# Altium PCB PCB_3U_BNC.PCBDOC
Units mil, origin at the board's own origin, x right, y up, seen from the top; angles counter-clockwise.
Board outline 2496.06 x 3937 mil, 4 copper layers (TopLayer, MidLayer1, Internal Plane 1, BottomLayer), stack 40.617 mil thick; 81 components, 65 nets, 423 pads, 254 vias.
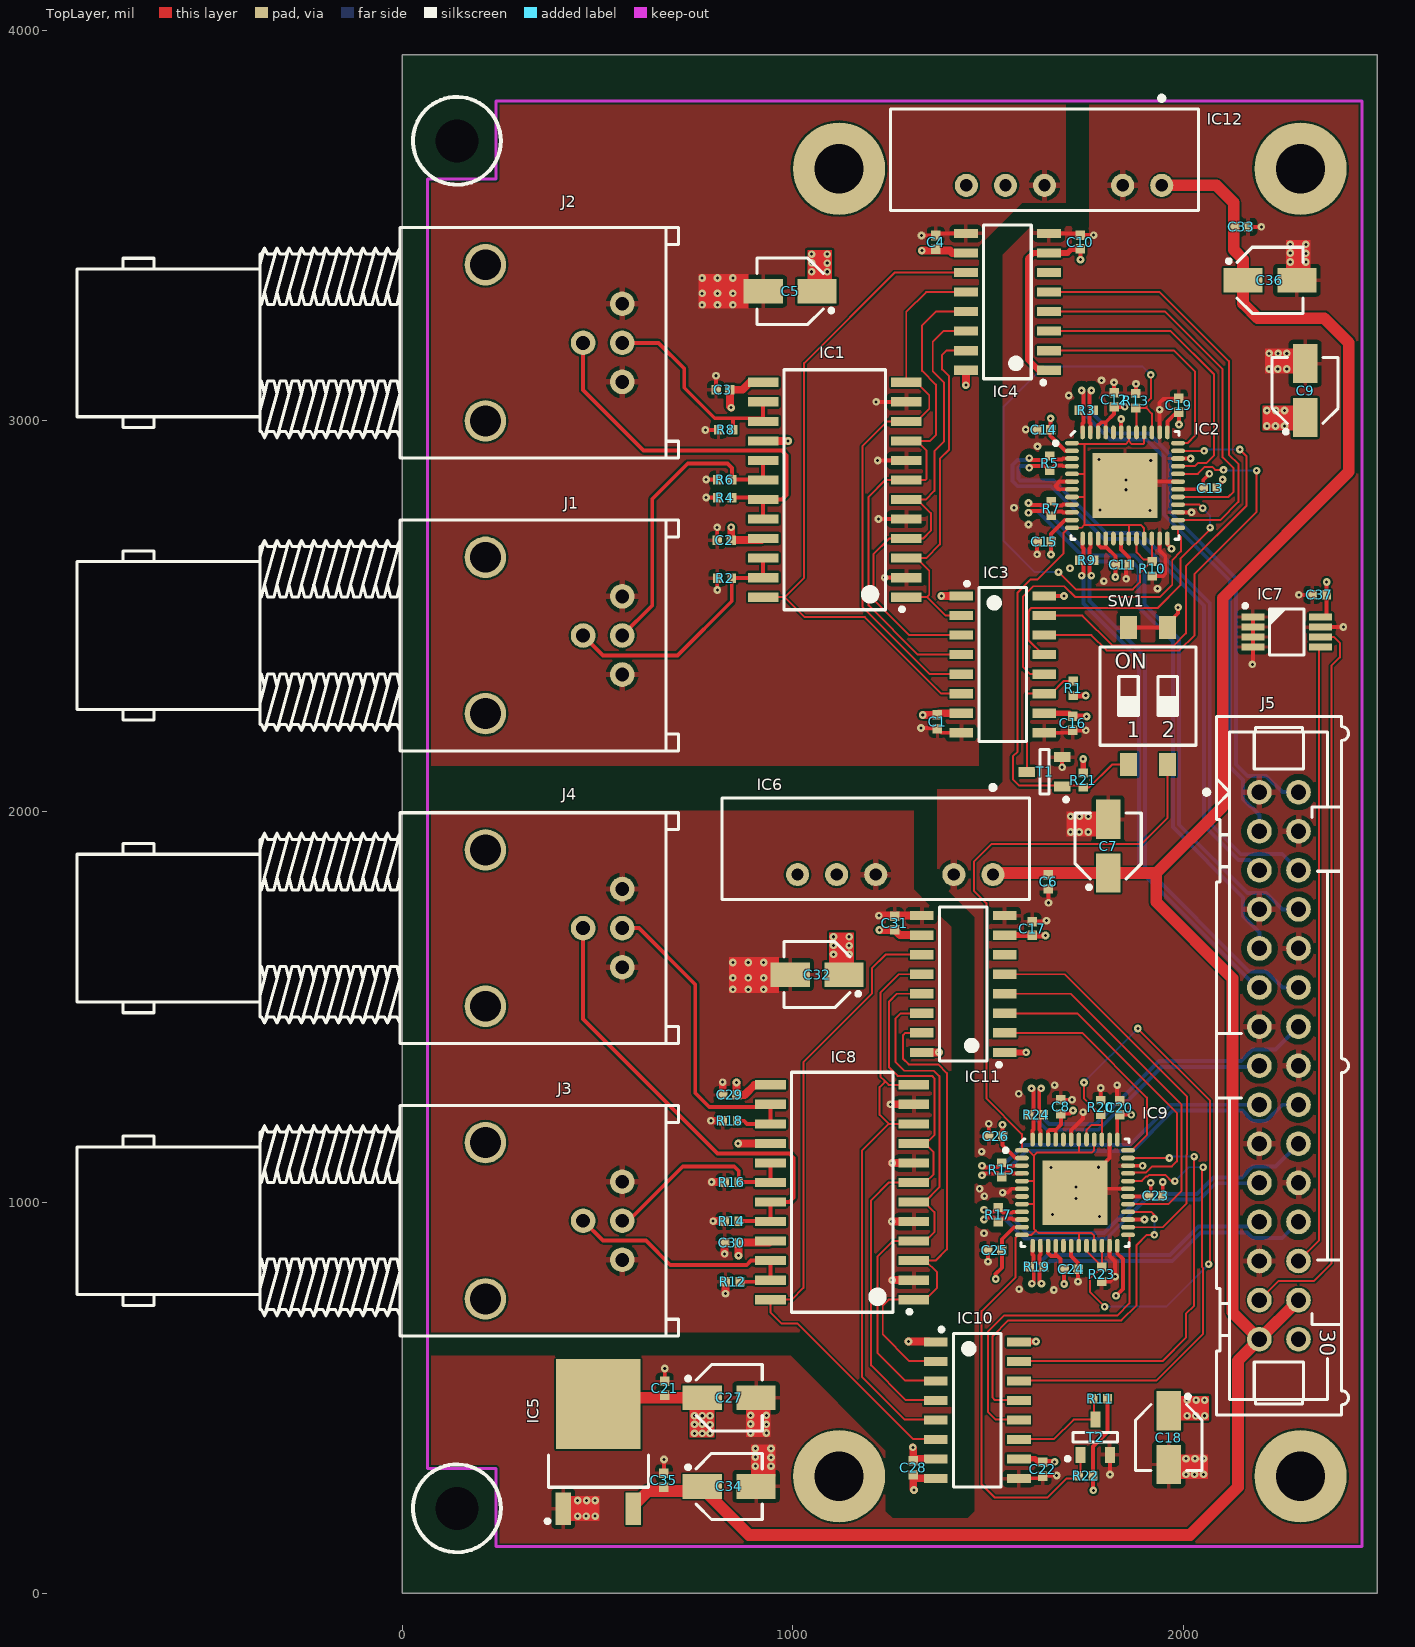
[diagram p0: TopLayer view]
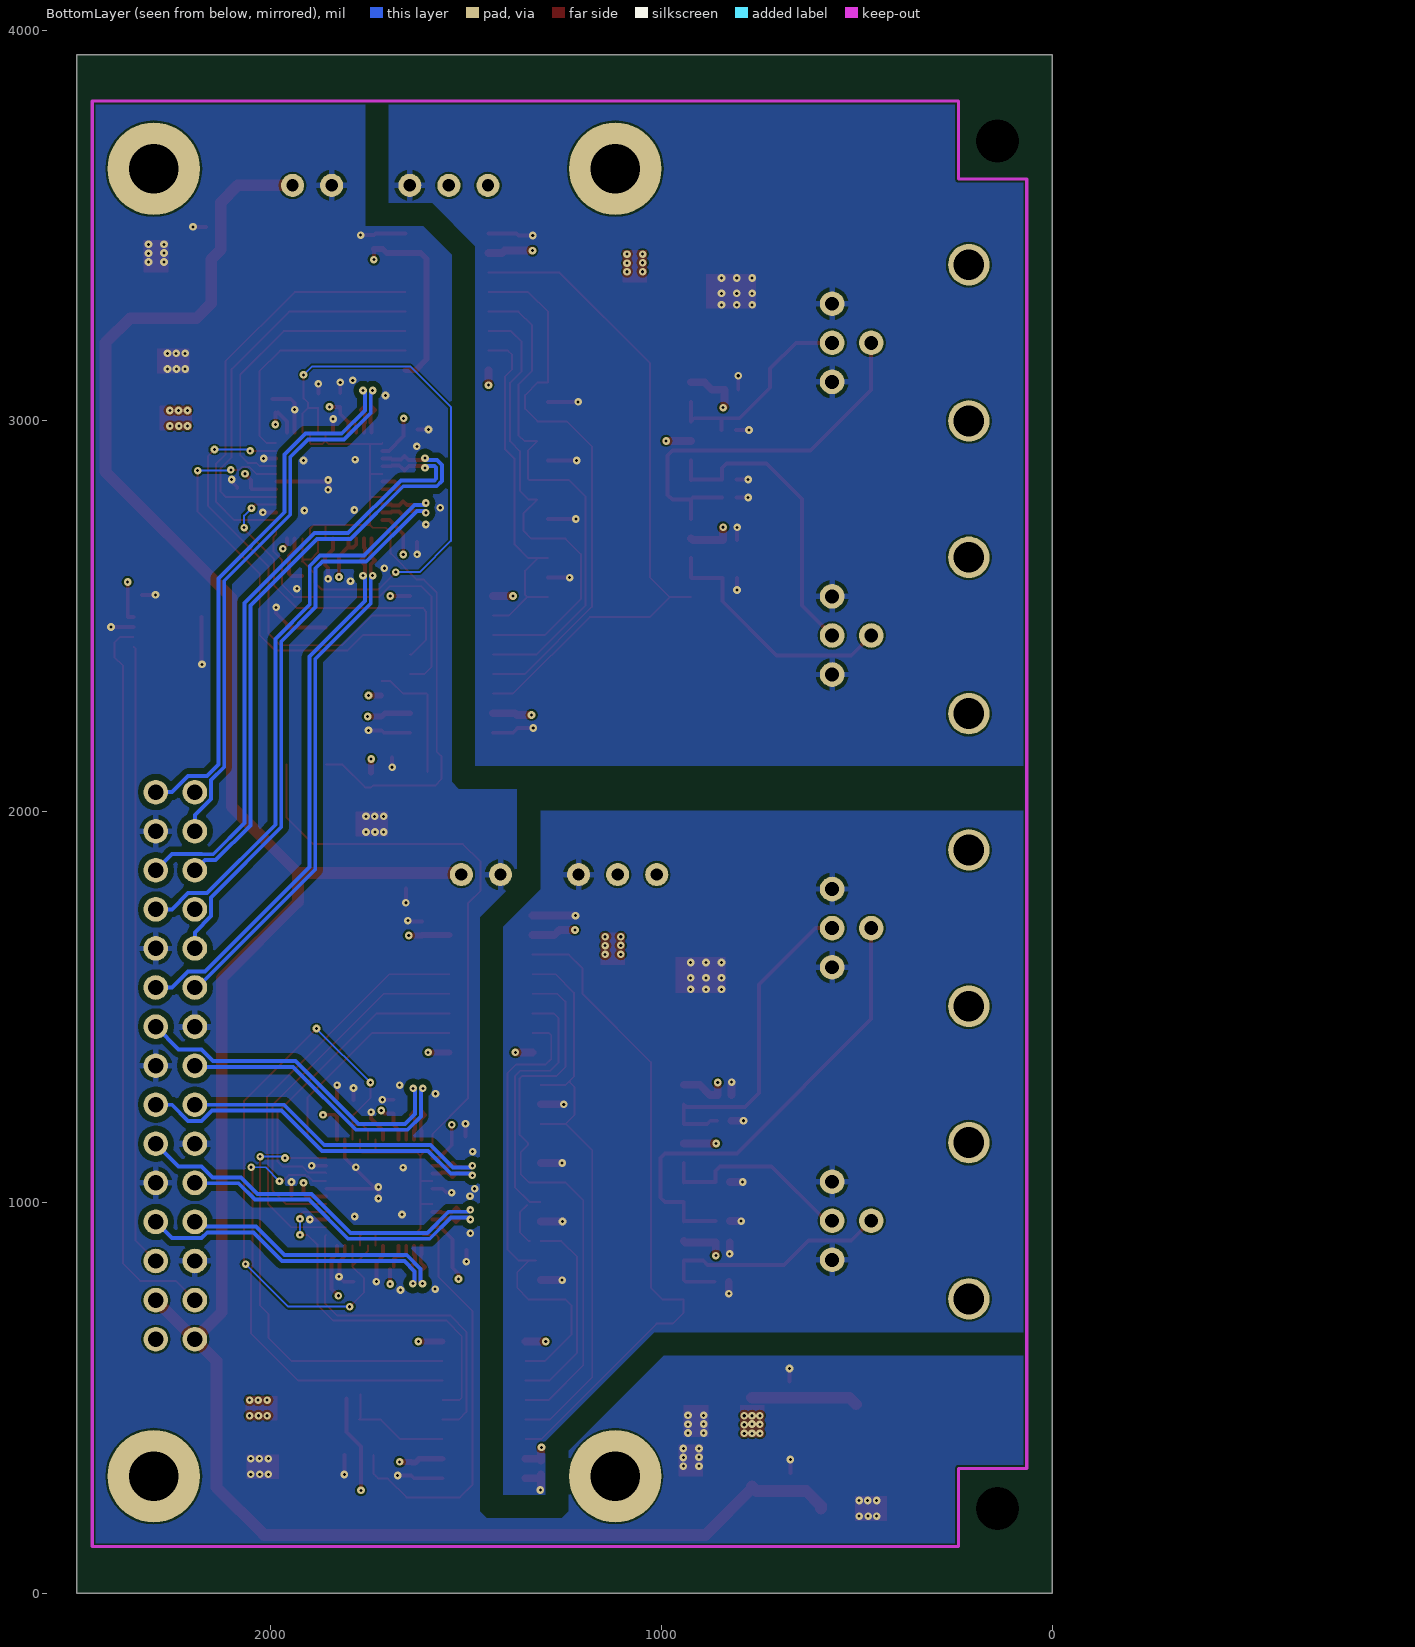
[diagram p1: BottomLayer view, seen from below]
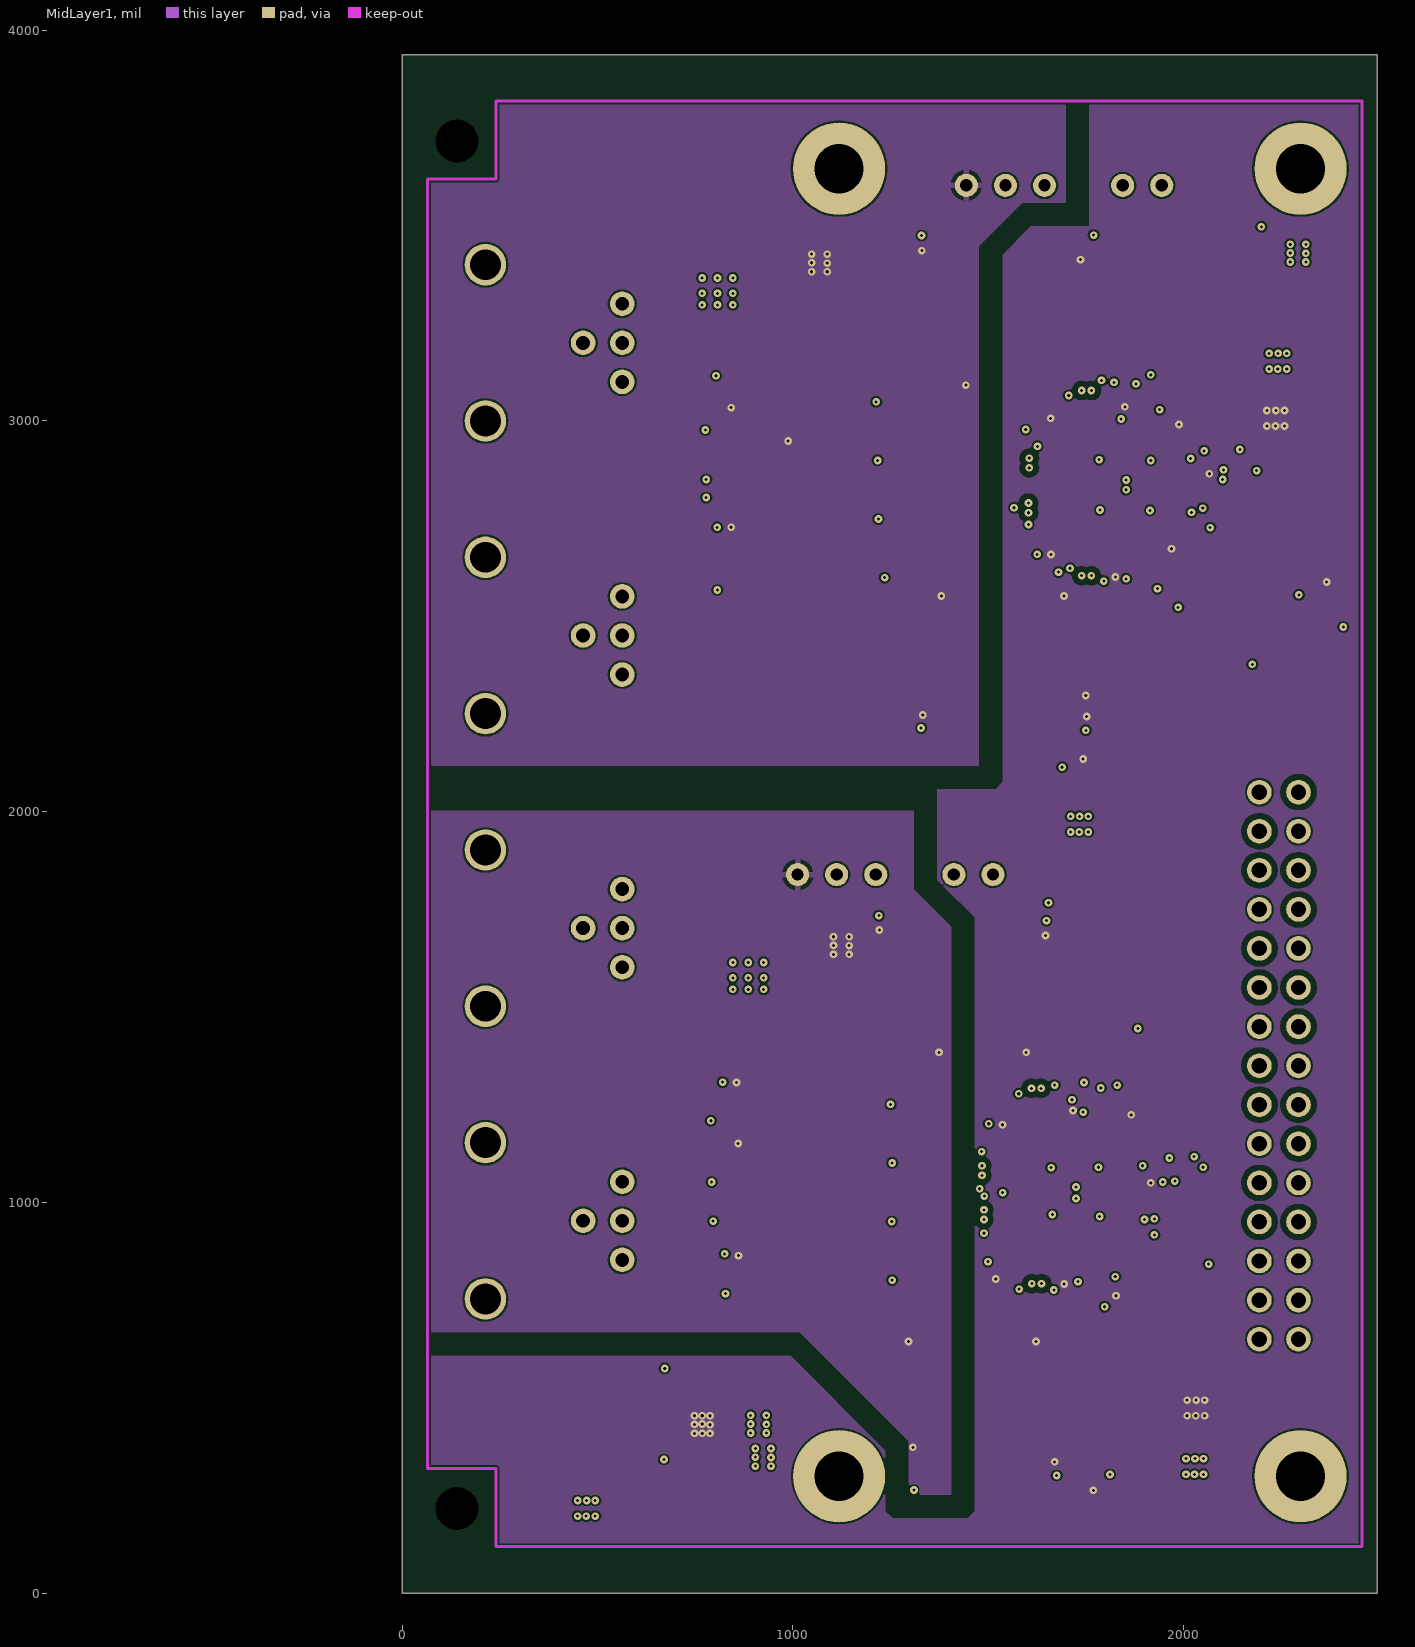
[diagram p2: MidLayer1]
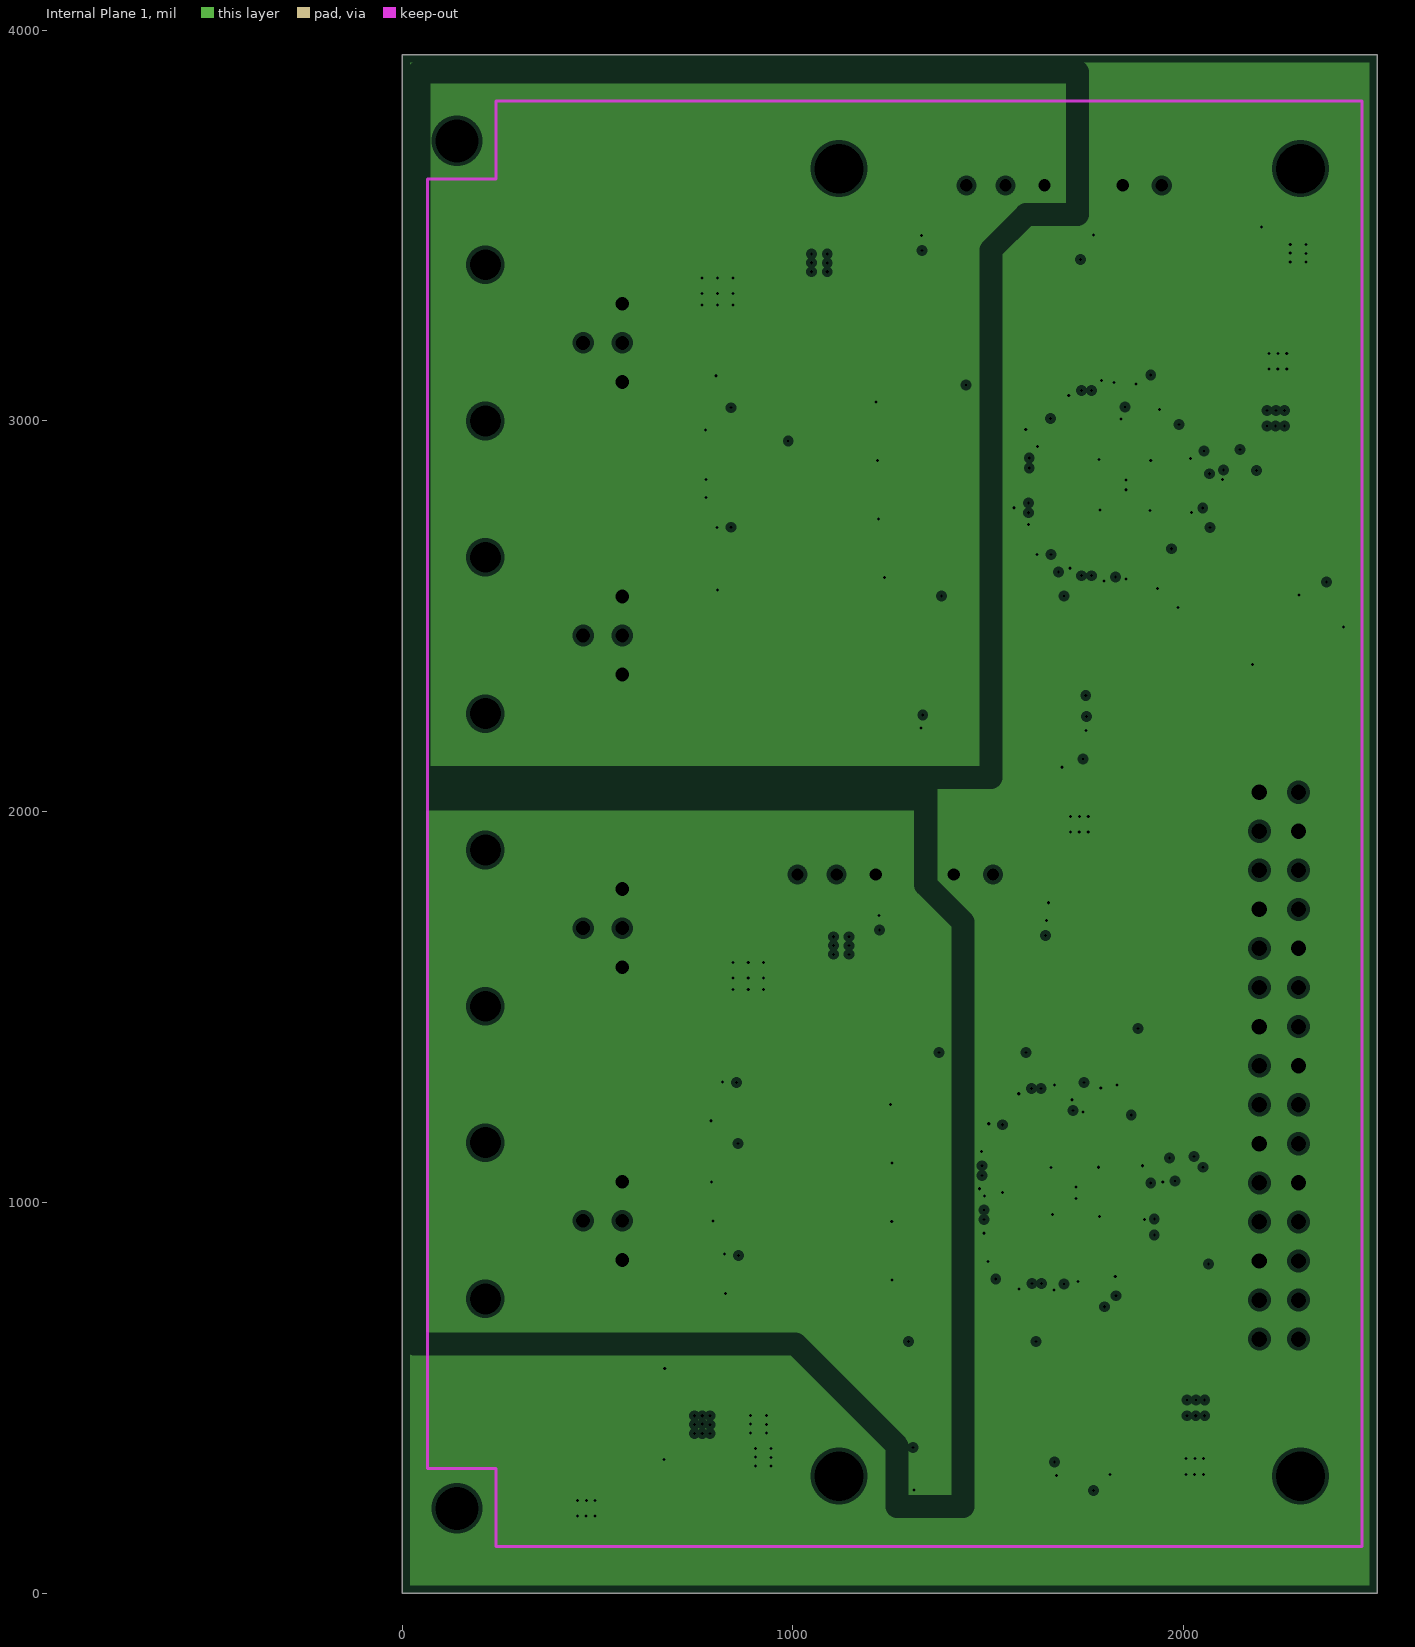
[diagram p3: Internal Plane 1, clearances drawn from the general rule]
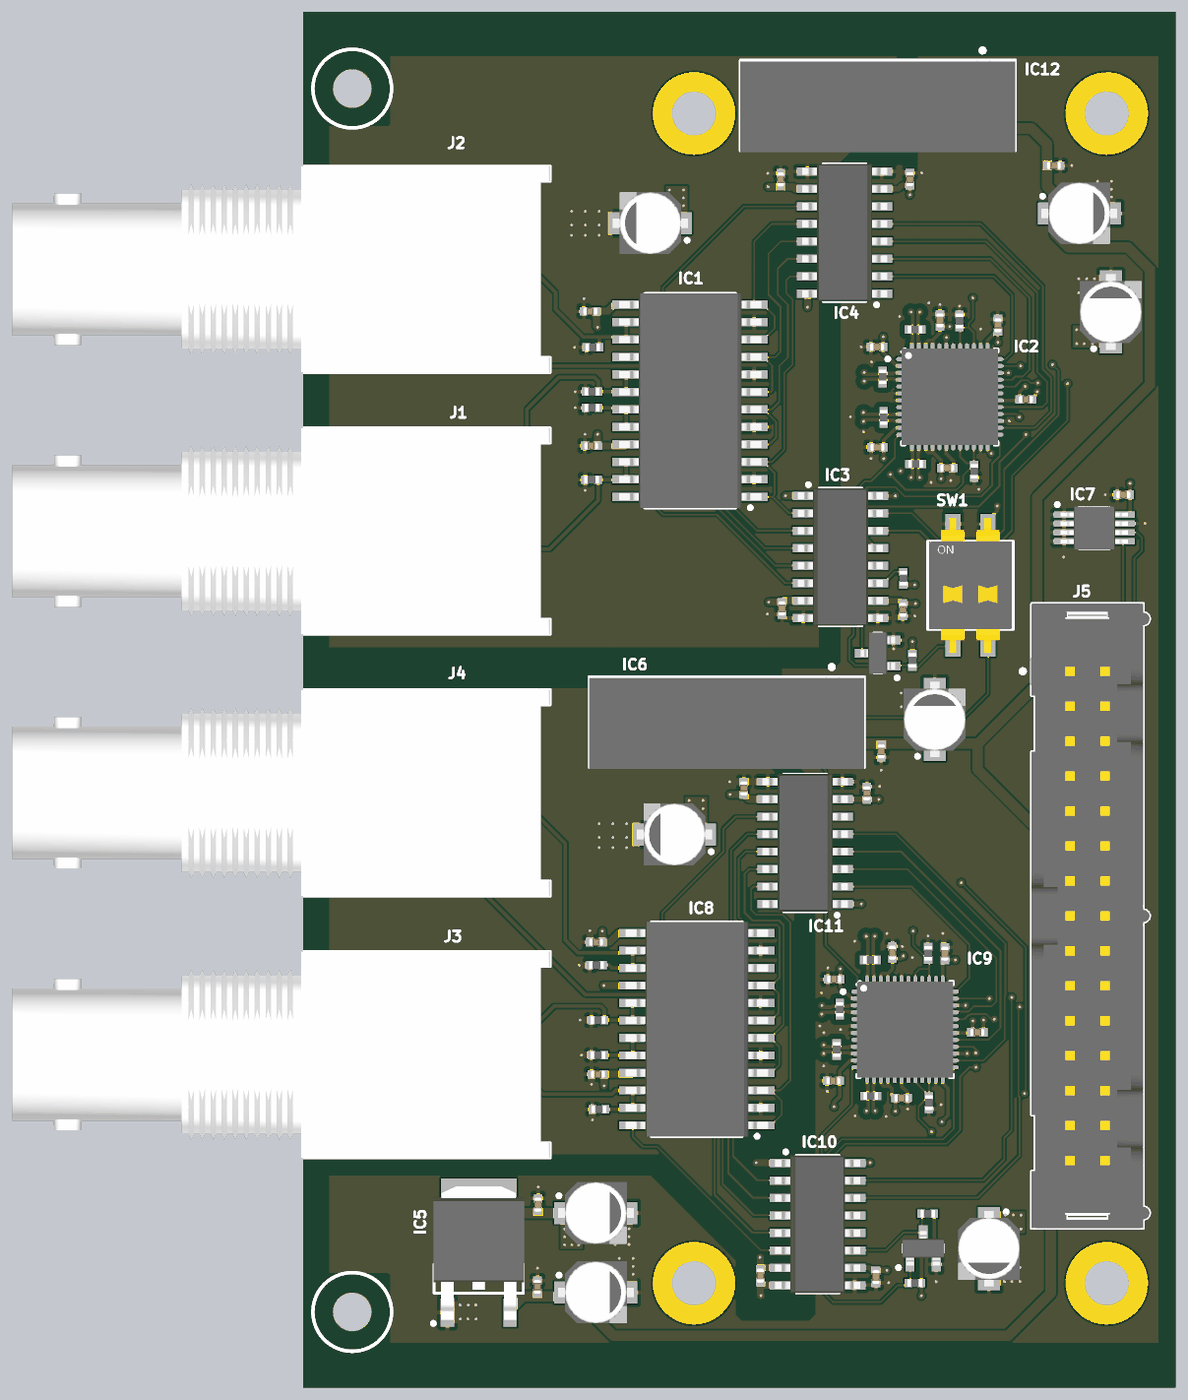
[diagram p4: 3D render of the assembled board from above, using the file's embedded part models]

## Layer stack, top to bottom
TopSolder: solder mask 0.4, Solder Resist, Dk 3.5
TopLayer: signal copper 1.4
Dielectric1: core 15, FR-4, Dk 4.8
MidLayer1: signal copper 1.4
Dielectric 3: prepreg 5, Dk 4.2
Internal Plane 1: plane copper 1.417, net (Multiple Nets)
Dielectric2: core 15, FR-4, Dk 4.2
BottomLayer: signal copper 1.4
BottomSolder: solder mask 0.4, Solder Resist, Dk 3.5

## Board outline
0,0 2496.06,0 2496.06,3937 0,3937

## Design rules (kind name [scope] priority, off if disabled: settings)
Clearance Clearance_1 [(InDifferentialPairClass('All Differential Pairs')) vs InPolygon] p1: gap=10 except(15: Arc-Poly Track-Poly SMDPad-Poly THPad-Poly Via-Poly Fill-Poly Poly-Poly)
Clearance [All] p2: gap=5
DiffPairsRouting [All] p1: maxlimit=10 minlimit=5 mostfreqgap=5 toplayer_minwidth=5 toplayer_maxwidth=15 toplayer_prefwidth=10 midlayer1_minwidth=5 midlayer1_maxwidth=15 midlayer1_prefwidth=10 bottomlayer_minwidth=5 bottomlayer_maxwidth=15 bottomlayer_prefwidth=10 maxuncoupledlength=500
FabricationTestPointUsage TestPointUsage [All] p1: valid=0 allowmultiple=FALSE
FabricationTestpoint Testpoint [All] p1: side=3 testpointundercomponent=TRUE minsize=40 maxsize=100 preferedsize=60 minholesize=20 maxholesize=40 preferedholesize=32 testpointgrid=1 allowsidetop=TRUE allowsidebottom=TRUE usegrid=TRUE gridtolerance=0.01
HoleSize [All] p1: absolutevalues=TRUE maxlimit=150 minlimit=1 maxpercent=80.000 minpercent=20.000
PlaneClearance [All] p1: clearance=10
PlaneConnect [All] p1: planeconnectstyle=Direct reliefexpansion=20 reliefentries=4 reliefconductorwidth=10 reliefairgap=10
PolygonConnect [All] p1: connectstyle=Relief reliefconductorwidth=10 reliefentries=4 polygonreliefangle="45 Angle" airgapwidth=10
RoutingVias [All] p1: holewidth=7.87 width=19.68 viastyle="Through Hole" minholewidth=7.87 minwidth=19.68 maxholewidth=28 maxwidth=50
SilkToSolderMaskClearance SilkscreenOverComponentPads [IsPad] p1: minsilkscreentomaskgap=10 clearancetoexposedcopper=TRUE
SolderMaskExpansion [All] p1: expansion=2
Width [All] p1: maxlimit=50 minlimit=5 preferedwidth=5
23 further rules are at their usual default settings.

## Classes and differential pairs
differential pair LVDS1: +LVDS1_P -LVDS1_N
differential pair LVDS2: +LVDS2_P -LVDS2_N
differential pair LVDS3: +LVDS3_P -LVDS3_N
differential pair LVDS4: +LVDS4_P -LVDS4_N
differential pair LVDS5: +LVDS5_P -LVDS5_N
differential pair LVDS6: +LVDS6_P -LVDS6_N
differential pair LVDS7: +LVDS7_P -LVDS7_N
differential pair LVDS8: +LVDS8_P -LVDS8_N

## Components (designator, comment, footprint, x,y, rotation, side; value= is the part's Value field where it differs from the comment)
C1 "100nF" CAPC1005X55N 1370,2230 r90 top
C2 "100nF" CAPC1005X55N 824,2695 r0 top
C3 "100nF" CAPC1005X55N 821,3080 r0 top
C4 "100nF" CAPC1005X55N 1366,3457 r270 top
C5 "10uF" CAPAE430X540N 993,3332 r180 top
C6 "100nF" CAPC1005X55N 1654,1821 r90 top
C7 "10uF" CAPAE430X540N 1807,1912 r90 top
C8 "100nF" CAPC1005X55N 1686,1245 r270 top
C9 "10uF" CAPAE430X540N 2311,3078 r90 top
C10 "100nF" CAPC1005X55N 1736,3458 r270 top
C11 "100nF" CAPC1005X55N 1843,2632 r180 top
C12 "100nF" CAPC1005X55N 1822,3054 r270 top
C13 "100nF" CAPC1005X55N 2068,2828 r180 top
C14 "100nF" CAPC1005X55N 1642,2978 r0 top
C15 "100nF" CAPC1005X55N 1643,2691 r0 top
C16 "100nF" CAPC1005X55N 1716,2226 r90 top
C17 "100nF" CAPC1005X55N 1613,1701 r270 top
C18 "10uF" CAPAE430X540N 1962,398 r270 top
C19 "100nF" CAPC1005X55N 1988,3040 r270 top
C20 "100nF" CAPC1005X55N 1836,1242 r270 top
C21 "100nF" CAPC1005X55N 672,524 r270 top
C22 "100nF" CAPC1005X55N 1639,317 r90 top
C23 "100nF" CAPC1005X55N 1929,1017 r180 top
C24 "100nF" CAPC1005X55N 1712,829 r180 top
C25 "100nF" CAPC1005X55N 1517,878 r0 top
C26 "100nF" CAPC1005X55N 1519,1169 r0 top
C27 "10uF" CAPAE430X540N 837,500 r0 top
C28 "100nF" CAPC1005X55N 1308,321 r90 top
C29 "100nF" CAPC1005X55N 838,1275 r0 top
C30 "100nF" CAPC1005X55N 843,897 r0 top
C31 "100nF" CAPC1005X55N 1261,1715 r270 top
C32 "10uF" CAPAE430X540N 1062,1583 r180 top
C33 "100nF" CAPC1005X55N 2148,3497 r180 top
C34 "10uF" CAPAE430X540N 837,273 r0 top
C35 "100nF" CAPC1005X55N 670,289 r270 top
C36 "10uF" CAPAE430X540N 2221,3360 r0 top
C37 "100nF" CAPC1005X55N 2347,2555 r0 top
IC1 "SN74BCT25245DW" SOIC127P1030X265-24N 1107,2824 r180 top
IC2 "SN65MLVD040RGZT" QFN50P700X700X100-49N-S420 1850,2835 r0 top
IC3 "SI8651BB-B-IS1" SOIC127P600X175-16N 1537,2377 r0 top
IC4 "SI8651BB-B-IS1" SOIC127P600X175-16N 1549,3305 r180 top
IC5 "LD1117DT33TR" TO228P972X240-3N-R540X510 502,387 r90 top
IC6 "TMA 0505S" DCDC_TRACO_TMA 1212,1839 r180 top
IC7 "24LC64-I/MS" SOP65P490X110-8N 2264,2460 r0 top
IC8 "SN74BCT25245DW" SOIC127P1030X265-24N 1126,1026 r180 top
IC9 "SN65MLVD040RGZT" QFN50P700X700X100-49N-S420 1722,1025 r0 top
IC10 "SI8651BB-B-IS1" SOIC127P600X175-16N 1472,468 r0 top
IC11 "SI8651BB-B-IS1" SOIC127P600X175-16N 1436,1559 r180 top
IC12 "TMA 0505S" DCDC_TRACO_TMA 1644,3603 r180 top
J1 "BNC" BOMAR_364A2595 319,2451 r180 top
J2 "BNC" BOMAR_364A2595 319,3200 r180 top
J3 "BNC" BOMAR_364A2595 319,953 r180 top
J4 "BNC" BOMAR_364A2595 319,1702 r180 top
J5 "Familly" 3M_N2530-6002RB 2244,1350 r270 top
R1 "10k" RESC1005X40N 1717,2316 r270 top
R2 "10k" RESC1005X40N 825,2598 r0 top
R3 "100" RESC1005X40N 1751,3028 r180 top
R4 "10k" RESC1005X40N 826,2804 r0 top
R5 "100" RESC1005X40N 1658,2892 r270 top
R6 "10k" RESC1005X40N 826,2850 r0 top
R7 "100" RESC1005X40N 1661,2776 r270 top
R8 "10k" RESC1005X40N 828,2977 r0 top
R9 "100" RESC1005X40N 1752,2643 r0 top
R10 "10k" RESC1005X40N 1920,2622 r270 top
R11 "10k" RESC1005X40N 1787,498 r0 top
R12 "10k" RESC1005X40N 846,797 r0 top
R13 "100" RESC1005X40N 1878,3052 r90 top
R14 "10k" RESC1005X40N 843,952 r0 top
R15 "100" RESC1005X40N 1535,1083 r270 top
R16 "10k" RESC1005X40N 843,1052 r0 top
R17 "100" RESC1005X40N 1526,968 r270 top
R18 "10k" RESC1005X40N 839,1209 r0 top
R19 "100" RESC1005X40N 1624,835 r0 top
R20 "10k" RESC1005X40N 1788,1243 r90 top
R21 "10k" RESC1005X40N 1743,2081 r90 top
R22 "10k" RESC1005X40N 1750,300 r0 top
R23 "100" RESC1005X40N 1790,816 r270 top
R24 "100" RESC1005X40N 1623,1224 r180 top
SW1 "Switch" SW_OMRON_A6S-2102-H 1909,2296 r90 top
T1 "BSS138LT1G" SOT95P240X110-3N 1644,2102 r180 top
T2 "BSS138LT1G" SOT95P240X110-3N 1774,399 r90 top

## Footprints (in the part's own frame and the unit in brackets; to place one, negate y for a bottom-side part, rotate by r counter-clockwise, add the part's x,y. Pads: shape width x height; smd on the part's side, far side on the other; paste and mask are expansions set on the pad)
3M_N2530-6002RB [mm] "30 Contacts - Straight .100\" x .100\" Low Profile Four-Wall Header"
  round 1.6 hole 1: 1(-17.78,-1.27) 2(-17.78,1.27) 3(-15.24,-1.27) 4(-15.24,1.27) 5(-12.7,-1.27) 6(-12.7,1.27) 7(-10.16,-1.27) 8(-10.16,1.27) 9(-7.62,-1.27) 10(-7.62,1.27) 11(-5.08,-1.27) 12(-5.08,1.27) 13(-2.54,-1.27) 14(-2.54,1.27) 15(0,-1.27) 16(0,1.27) 17(2.54,-1.27) 18(2.54,1.27) 19(5.08,-1.27) 20(5.08,1.27) 21(7.62,-1.27) 22(7.62,1.27) 23(10.16,-1.27) 24(10.16,1.27) 25(12.7,-1.27) 26(12.7,1.27) 27(15.24,-1.27) 28(15.24,1.27) 29(17.78,-1.27) 30(17.78,1.27)
  silkscreen extent -22.71,-4.85 22.71,4.52, body extent -22.71,-4.11 22.71,4.52, height 9.91
BOMAR_364A2595 [mm] "Dual Right Angle 50 Ohm BNC Jack, White Valox Case"
  round 1.6 hole 0.9: 1(-6.2,2.54) 2(-6.2,0) 3(-6.2,-2.54) 4(-3.66,0)
  round 2.7 hole 2: 6(2.69,-5.08) 7(2.69,5.08)
  silkscreen extent -9.85,-7.5 29.25,7.5, body extent -9.85,-7.5 29.25,7.5, height 29.3
CAPAE430X540N [mm] "Capacitor, Aluminium Electrolytric, 4.3mm L X 4.3mm W X 5.4mm H, IPC Medium Density"
  rect 2.55x1.6 smd: 1(-1.75,0) 2(1.75,0)
  silkscreen extent -2.8,-2.15 2.15,2.15, body extent -2.75,-2.25 2.75,2.25, height 5.7
CAPC1005X55N [mm] "Chip Capacitor, Body 1.0x0.55mm, IPC Medium Density"
  rect 0.62x0.62 smd: 1(-0.45,0) 2(0.45,0)
  body extent -0.52,-0.27 0.53,0.28, height 0.55
DCDC_TRACO_TMA [mm] "TMA Series , Body 19.5x6.1mm, SIP-6, Unregulated"
  round 1.5 hole 0.8: 1(-7.62,0) 2(-5.08,0) 4(0,0) 5(2.54,0) 6(5.08,0)
  silkscreen extent -10,-5.82 10,1.63, body extent -10,-4.97 10,1.73, height 10.45
QFN50P700X700X100-49N-S420 [mm] "QFN, 0.50mm Pitch, Square; 48 Pin, 7.00mm L X 7.00mm W X 1mm H body (W/Thermal Tab 4.2mm X 4.2mm), IPC Medium Density"
  oval 0.9x0.3 smd: 1(-3.45,2.75) 2(-3.45,2.25) 3(-3.45,1.75) 4(-3.45,1.25) 5(-3.45,0.75) 6(-3.45,0.25) 7(-3.45,-0.25) 8(-3.45,-0.75) 9(-3.45,-1.25) 10(-3.45,-1.75) 11(-3.45,-2.25) 12(-3.45,-2.75) 25(3.45,-2.75) 26(3.45,-2.25) 27(3.45,-1.75) 28(3.45,-1.25) 29(3.45,-0.75) 30(3.45,-0.25) 31(3.45,0.25) 32(3.45,0.75) 33(3.45,1.25) 34(3.45,1.75) 35(3.45,2.25) 36(3.45,2.75)
  oval 0.3x0.9 smd: 13(-2.75,-3.45) 14(-2.25,-3.45) 15(-1.75,-3.45) 16(-1.25,-3.45) 17(-0.75,-3.45) 18(-0.25,-3.45) 19(0.25,-3.45) 20(0.75,-3.45) 21(1.25,-3.45) 22(1.75,-3.45) 23(2.25,-3.45) 24(2.75,-3.45) 37(2.75,3.45) 38(2.25,3.45) 39(1.75,3.45) 40(1.25,3.45) 41(0.75,3.45) 42(0.25,3.45) 43(-0.25,3.45) 44(-0.75,3.45) 45(-1.25,3.45) 46(-1.75,3.45) 47(-2.25,3.45) 48(-2.75,3.45)
  rect 4.2x4.2 smd: 49(0,0)
  silkscreen extent -4.62,-3.5 3.5,3.5, body extent -3.5,-3.5 3.5,3.5, height 1
RESC1005X40N [mm] "Chip Resistor, EIA 0402, Metric 1005, Body 1.0x0.5mm, IPC Medium Density"
  rect 0.58x0.62 smd: 1(-0.47,0) 2(0.47,0)
  body extent -0.52,-0.27 0.53,0.28, height 0.4
SOIC127P600X175-16N [mm] "SOIC 16, Pitch 1.27mm - Body 4x10mm, IPC Medium Density"
  rect 1.55x0.6 smd: 1(-2.7,4.445) 2(-2.7,3.175) 3(-2.7,1.905) 4(-2.7,0.635) 5(-2.7,-0.635) 6(-2.7,-1.905) 7(-2.7,-3.175) 8(-2.7,-4.445) 9(2.7,-4.445) 10(2.7,-3.175) 11(2.7,-1.905) 12(2.7,-0.635) 13(2.7,0.635) 14(2.7,1.905) 15(2.7,3.175) 16(2.7,4.445)
  silkscreen extent -2.45,-5 1.55,5.37, body extent -3.1,-5 3.1,5, height 1.75
SOIC127P1030X265-24N [mm] "SOIC 24, Pitch 1.27mm - Body 7.6x15.6mm, IPC Medium Density"
  rect 2x0.6 smd: 1(-4.65,6.985) 2(-4.65,5.715) 3(-4.65,4.445) 4(-4.65,3.175) 5(-4.65,1.905) 6(-4.65,0.635) 7(-4.65,-0.635) 8(-4.65,-1.905) 9(-4.65,-3.175) 10(-4.65,-4.445) 11(-4.65,-5.715) 12(-4.65,-6.985) 13(4.65,-6.985) 14(4.65,-5.715) 15(4.65,-4.445) 16(4.65,-3.175) 17(4.65,-1.905) 18(4.65,-0.635) 19(4.65,0.635) 20(4.65,1.905) 21(4.65,3.175) 22(4.65,4.445) 23(4.65,5.715) 24(4.65,6.985)
  silkscreen extent -4.5,-7.8 3.3,7.9, body extent -5.18,-7.8 5.18,7.8, height 1.68
SOP65P490X110-8N [mm] "SOP, 0.65mm pitch; 8 pin, 3.00mm W X 3.00mm L X 1.10mm H body, IPC Medium Density"
  rect 1.5x0.45 smd: 1(-2.2,0.975) 2(-2.2,0.325) 3(-2.2,-0.325) 4(-2.2,-0.975) 5(2.2,-0.975) 6(2.2,-0.325) 7(2.2,0.325) 8(2.2,0.975)
  silkscreen extent -2.82,-1.5 1.12,1.82, body extent -2.45,-1.55 2.45,1.55, height 1.1
SOT95P240X110-3N [mm] "SOT23 3-Leads, Pitch 0.95mm, Body 1.3x2.9mm, IPC Medium Density"
  rect 1.05x0.65 smd: 1(-1.15,0.95) 2(-1.15,-0.95) 3(1.15,0)
  silkscreen extent -1.53,-1.45 0.3,1.92, body extent -1.25,-1.5 1.25,1.5, height 1.1
SW_OMRON_A6S-2102-H [mm] "Pitch 2.54mm, Body 6.2x6.4mm, 2 Ways SPST Surface-Mounting DIP Switch, OMRON A6S-H"
  rect 1.5x1.1 smd: 1(-4.45,1.27) 2(-4.45,-1.27) 3(4.45,-1.27) 4(4.45,1.27)
  silkscreen extent -3.2,-3.11 3.2,3.11, body extent -4.9,-3.01 4.9,3.01, height 3.97
TO228P972X240-3N-R540X510 [mm] "DPAK TO-252, 2.28mm pitch; 2 pin, 9.725mm L X 6.10mm W X 2.40mm H body, IPC Medium Density"
  rect 2.1x1 smd: 1(-4.35,2.28) 2(-4.35,-2.28)
  rect 5.85x5.5 smd: 3(2.45,0)
  silkscreen extent -5.27,-3.25 -0.85,3.42, body extent -4.9,-3.3 4.82,3.3, height 2.4

## Part data
C1 C2 C3 C4 C6 C8 C10 C11 C12 C13 C14 C15 C16 C17 C19 C20 C21 C22 C23 C24 C25 C26 C28 C29 C30 C31 C33 C35 C37: library part CC0402_100NF_16V_10%_X5R, "Non-polarised capacitor"
C5 C18 C27 C32 C34 C36: library part CAE430-540_10UF_16V_20%, "Polarised capacitor"
C7 C9: library part CC0805_22UF_16V_10%_X5R, "Non-polarised capacitor"
IC1 IC8: "25 Ohms Octal Bus Transceiver With 3-State Outputs"
IC2 IC9: "4-Channel Half-Duplex M-LVDS Line Transceiver"
IC3 IC4 IC10 IC11: "Low Power Five-Channel Digital Isolator"
IC5: library part TPS62175DQC, "4.75-28VDC to 1-6VDC, 500mA Step-Down Converter With Sleep Mode"
IC6 IC12: "1 W Watt, 10.8-13.2VDCVin, 5 V@0.2 A"
IC7: library part 24AA02E48T-I/OT, "1.7V-5.5V, 2K I2C Serial EEPROM With EUI-48 Node Identity"
J1 J2 J3 J4: library part BOMAR_364A2595, "Dual Right Angle 50 Ohm BNC Jack, White Valox Case"
J5: library part 3M_N2530-6002RB, "Connector 30 Male"
R1 R2 R4 R6 R8 R10 R11 R12 R14 R16 R18 R20 R23: library part R0402_10K_1%_0.0625W_100PPM, "Resistor - 1%"
R3 R5 R7 R9 R13 R15 R17 R19: library part R0402_100R_1%_0.1W_100PPM, "Resistor - 1%"
R21 R22 R24: library part R0603_220R_1%_0.1W_100PPM, "Resistor - 1%"
SW1: library part COMATEL_313.1730.0.00.40.0, "Jumper 1 Pin"
T1 T2: "N-CHANNEL MOSFET WITH DIODE"

## Free pads (board coordinates)
  round 236.22 hole 125.98: 0(2299.21,299.21) 1(2299.21,3645.67) 2(1118.11,3645.67) 3(1118.11,299.21)
  round 50 hole 110: 1(140,3717) 2(140,217)

## Via types
v1: diameter 19.68, hole 7.87, TopLayer to BottomLayer, tented both sides, 254 vias

## Nets (pads, with @x,y where several pads share a name; then routed paths per layer and width w, separated by ;. In a path a pad name is that pad's centre, name@x,y a point inside that pad or via, vN(x,y) a via of type N, cw(c..) or ccw(c..) an arc to the next point about the centre after c; other vN are vias at no path point)
GND: C6.1 C7.2 C8.1 C9.2 C10.1 C11.1 C12.1 C13.1 C14.1 C15.1 C16.1 C17.1 C18.2 C19.1 C20.1 C21.1 C22.1 C23.1 C24.1 C25.1 C26.1 C27.2 C33.1 C34.2 C35.1 C36.2 C37.1 IC2.6 IC2.7 IC2.18 IC2.23 IC2.27 IC2.31 IC2.34 IC2.38 IC2.43 IC2.49 IC3.9 IC4.8 IC5.1 IC6.2 IC7.1 IC7.2 IC7.3 IC7.4 IC7.7 IC9.6 IC9.7 IC9.18 IC9.23 IC9.27 IC9.31 IC9.34 IC9.38 IC9.43 IC9.49 IC10.9 IC11.8 IC12.2 J5.1 J5.4 J5.7 J5.10 J5.13 J5.16 J5.19 J5.22 J5.25 R10.2 R13.2 R20.2 R23.2 SW1.3 SW1.4 T1.2 T2.2 | length 2754.7
  TopLayer w10: C35.1 v1(670,342) ; C21.1 v1(672,575) ; v1(1499.28,848.28) C25.1 ; C26.1 v1(1501.28,1201.28) ; 1550,1025 1559.84,1034.84 IC9.6 ; IC10.9@1560.3,294 1633.72,294 C22.1 1640.72,301 v1(1675,301) ; v1(1596,2978) C14.1 ; C17.1 1646.72,1718.72 v1(1649,1721) ; v1(1625.28,2658.72) C15.1 ; IC3.9 1709.72,2202 C16.1 v1(1749.72,2208.28) ; v1(1654,1767) C6.1 ; IC4.8 1731.72,3480 C10.1 v1(1769.72,3475.72) ; C8.1 v1(1714.28,1262.72) ; v1(1689.28,2113.72) T1.2 ; IC9.18 1712.16,862.84 1729.72,845.28 C24.1 v1(1729.72,797.28) ; IC9.43 1712.16,1184.16 1743,1215 v1(1743,1231) ; IC2.7 1680.84,2825.16 1672,2834 1682.84,2844.84 IC2.6 ; IC9.49 IC9.49@1731.84,1034.84 ; R23.2@1788,797 1812,797 v1(1825,810) 1824.16,810.84 1824.16,848.84 1810.58,862.42 IC9.23 ; R20.2 v1(1788,1293) ; IC9.38 1810.58,1113.58 IC9.49@1731.84,1034.84 ; v1(1811.4,303.6) T2.2 ; C12.1 v1(1822,3099) ; v1(1830,1300) 1830,1265.72 C20.1 ; IC2.18 1840.16,2670.84 1860.72,2650.28 C11.1 1853,2624.28 v1(1853,2596) ; IC2.43 v1(1840.16,3005.16) ; IC2.49 1859.84,2844.84 IC2.31 ; IC9.27 v1(1899.9,956.1) ; IC9.31 IC9.49@1731.84,1034.84 ; IC9.34 v1(1895.1,1093.9) ; SW1.4 SW1.3 1959,2481 1986,2508 v1(1986,2523) ; R13.2 v1(1878,3095) ; R10.2 1947.5,2603.5 1953,2609 1953,2654 1938.58,2668.42 IC2.23 ; IC2.38 v1(1938.58,3029) 1938.58,3046.58 1948.72,3056.72 C19.1@1995,3056.72 ; C23.1 v1(1946.72,1052.28) ; IC2.27 v1(2020.1,2766.1) ; IC2.34 v1(2017.9,2903.9) ; C13.1 2085.72,2830.72 2100,2845 v1(2100,2850) ; C33.1 v1(2199,3497) ; v1(2176,2377) 2177.39,2378.39 IC7.4 IC7.3 IC7.2 IC7.1 ; v1(2295,2555) C37.1 ; IC7.7 v1(2408.8,2472.8)
  other v1: 449,197 471,197 494,197 449,237 472,237 494,237 2006,304 2028,304 2051,304 904,325 944,325 2006,344 2029,344 2051,344 944,347 904,348 904,370 944,370 892,410 932,410 932,432 892,433 892,455 932,455 1668,776 1579,778 1489,921 1785,964 1664,969 1724.39,1010.09 1490,1016 1537,1025 1478,1035 1724.39,1039.62 1661,1089 1782,1090 1483,1130 1578,1278 1670,1300 1711,1948 1733,1948 1756,1948 1711,1988 1734,1988 1756,1988 1933,2571 1796,2590 1709,2623 1603,2735 1914,2771 1786,2772 1566,2778 1853,2824 1853,2849 1916,2899 1784,2901 1626,2935 1706,3065 1790,3104 2219,3133 2241,3133 2264,3133 2219,3173 2242,3173 2264,3173 2273,3407 2313,3407 2313,3429 2273,3430 2273,3452 2313,3452
GND_ISO1: C1.1 C2.1 C3.1 C4.1 C5.2 IC1.2 IC1.5 IC1.8 IC1.11 IC3.8 IC4.9 IC12.4 J1.1 J1.3 J2.1 J2.3 R2.1 R4.1 R6.1 R8.1 | length 691
  TopLayer w10: v1(776,2977) R8.1 ; v1(778,2804) R4.1 ; v1(778,2850) R6.1 ; C3.1 v1(803.28,3115.72) ; C2.1 v1(806.28,2727.72) ; v1(806.5,2567.5) R2.1 ; v1(1213,3049) IC1.11 ; v1(1217,2899) IC1.8 ; v1(1219,2749) IC1.5 ; v1(1235,2599) IC1.2 ; v1(1328,2214) 1368.28,2214 C1.1 1380.28,2202 IC3.8 ; v1(1329.28,3474.72) C4.1 1371.28,3480 IC4.9
  other v1: 767.72,3297.24 807.09,3297.24 846.46,3297.24 767.72,3326.77 807.09,3326.77 846.46,3326.77 767.72,3366.14 807.09,3366.14 846.46,3366.14
GND_ISO2: C28.1 C29.1 C30.1 C31.1 C32.2 IC6.4 IC8.2 IC8.5 IC8.8 IC8.11 IC10.8 IC11.9 J3.1 J3.3 J4.1 J4.3 R12.1 R14.1 R16.1 R18.1 | length 598.2
  TopLayer w20: v1(790,1209) R18.1 ; v1(792,1052) R16.1 ; v1(796,952) R14.1 ; C29.1 v1(820.28,1307.72) ; v1(825.28,868.28) C30.1 ; v1(827.5,766.5) R12.1 ; v1(1220,1734) IC11.9 ; v1(1250,1251) IC8.11 ; v1(1253,951) IC8.5 ; v1(1254,801) IC8.2 ; v1(1254,1101) IC8.8 ; C28.1 C28.1@1308,294 ; v1(1310,264) 1308,266 C28.1@1308,294 ; IC10.8@1347.7,294 C28.1@1308,294
  other v1: 846.46,1545.28 885.83,1545.28 925.2,1545.28 846.46,1574.8 885.83,1574.8 925.2,1574.8 846.46,1614.17 885.83,1614.17 925.2,1614.17
I2C_SCL: IC7.6 J5.27 | length 1876.3
  TopLayer w5: J5.27 2243,799 2334,799 2378,843 2378,2373 2400,2395 2400,2432 2384.8,2447.2 IC7.6
I2C_SDA: IC7.5 J5.26 | length 1595.1
  TopLayer w5: J5.26 2346,902 2346,2417 IC7.5
IO1: IC1.22 IC1.23 J1.4 R2.2 | length 649.2
  TopLayer w10: J1.4 514.09,2400 705,2400 843.5,2538.5 R2.2 922.93,2598 IC1.23 IC1.22
IO2: IC1.19 IC1.20 J2.4 R4.2 | length 1008.7
  TopLayer w10: J2.4 463.09,3078.91 618,2924 972,2924 984,2912 984,2811 972,2799 IC1.19 ; R4.2 918.93,2804 IC1.19 ; IC1.20 IC1.19
IO3: IC1.17 IC1.18 J1.2 R6.2 | length 787.2
  TopLayer w10: J1.2 640,2527.91 640,2800 731,2891 833,2891 844.5,2879.5 R6.2 922.93,2850 IC1.18 IC1.17
IO4: IC1.14 IC1.15 J2.2 R8.2 | length 553
  TopLayer w10: J2.2 656,3200 722,3134 722,3085 800,3007 846,3007 ; R8.2 846.5,3006.5 846,3007 ; IC1.14 IC1.15 915.93,3007 846,3007
IO5: IC8.22 IC8.23 J3.4 R12.2 | length 661.3
  TopLayer w10: J3.4 514.09,902 624,902 686,840 882,840 893,851 IC8.22 IC8.23 938.93,797 R12.2
IO6: IC8.19 IC8.20 J4.4 R14.2 | length 1216.5
  TopLayer w10: J4.4 463.09,1468.91 807,1125 991,1125 1002,1114 1002,1012 991,1001 IC8.19 IC8.20 941.93,952 R14.2
IO7: IC8.17 IC8.18 J3.2 R16.2 | length 521.1
  TopLayer w10: J3.2 579,953 718,1092 850,1092 861.5,1080.5 R16.2 941.93,1052 IC8.18 IC8.17
IO8: IC8.14 IC8.15 J4.2 R18.2 | length 874
  TopLayer w10: J4.2 606,1702 750,1558 750,1280 786,1244 935.93,1244 IC8.14 IC8.15 883,1201 875,1209 R18.2
LVDS1_N: IC2.48 J5.3 R3.2 | length 1491.7
  TopLayer w10: v1(1739.16,3078) 1744,3073.16 1744,3039.5 R3.2 1744.07,3016.42 1744.07,2995.89 1741.73,2993.54 IC2.48
  BottomLayer w10: v1(1739.16,3078) 1741,3078 1744,3075 1744,3020.72 1811.91,2952.81 1904.98,2952.81 1949.89,2907.89 1949.89,2760.11 2119,2591 2119,2114.4 2152.51,2080.89 2152.51,2032.81 2194,1991.32 J5.3
LVDS1_P: IC2.47 J5.2 R3.1 | length 1478.4
  TopLayer w10: IC2.47 1761.42,2993.54 1759.07,2995.89 1759.07,3017.57 R3.1 1759,3038.5 1759,3073.16 v1(1763.84,3078)
  BottomLayer w10: v1(1763.84,3078) 1762,3078 1759,3075 1759,3026.94 1818.13,2967.81 1911.19,2967.81 1964.89,2914.11 1964.89,2766.32 2134,2597.21 2134,2120.61 2163.11,2091.5 2211.19,2091.5 2252.69,2050 J5.2
LVDS2_N: IC2.4 J5.6 R5.2 | length 1650
  TopLayer w10: v1(1605,2880.16) 1605,2885 1646.5,2885 R5.2 1663,2878.5 1663,2878.56 1671,2886.56 1689.11,2886.56 1691.46,2884.21 IC2.4
  BottomLayer w10: v1(1605,2880.16) 1605.92,2881.08 1603.13,2881.08 1599.21,2885 1581,2885 1577,2881 1577,2852.21 1581.21,2848 1667,2848 1802,2713 1888.21,2713 2067,2534.21 2067,1971 2147,1891 2176.32,1891 2176.81,1891.5 2252.51,1891.5 J5.6
LVDS2_P: IC2.3 J5.5 R5.1 | length 1589.7
  TopLayer w10: v1(1605,2904.84) 1605,2902.06 1607.06,2900 1647.5,2900 R5.1 1666.95,2901.56 1689.11,2901.56 1691.46,2903.9 IC2.3
  BottomLayer w10: v1(1605,2904.84) 1605.92,2903.92 1602,2900 1574.79,2900 1562,2887.21 1562,2846 1575,2833 1660.79,2833 1795.79,2698 1882,2698 2052,2528 2052,1964.79 2140.79,1876 2168,1876 J5.5
LVDS3_N: IC2.10 J5.9 R7.2 | length 1571.4
  TopLayer w10: v1(1603,2765.16) 1607.84,2770 1648.5,2770 R7.2 1671.95,2768.44 1689.11,2768.44 1691.46,2766.1 IC2.10
  BottomLayer w10: v1(1603,2765.16) 1603,2768 1605,2770 1626,2770 1755.5,2640.5 1867.5,2640.5 1885,2623 1885,2523.79 1973,2435.79 1973,1960.4 2152.51,1780.89 2152.51,1732.81 2194,1691.32 J5.9
LVDS3_P: IC2.9 J5.8 R7.1 | length 1582.6
  TopLayer w10: v1(1603,2789.84) 1607.84,2785 1651.5,2785 R7.1 1672.06,2783.44 1689.11,2783.44 1691.46,2785.79 IC2.9
  BottomLayer w10: v1(1603,2789.84) 1603,2787 1605,2785 1632.21,2785 1761.71,2655.5 1873.71,2655.5 1900,2629.21 1900,2530 1988,2442 1988,1966.61 2163.11,1791.5 2211.19,1791.5 2252.69,1750 J5.8
LVDS4_N: IC2.14 J5.12 R9.2 | length 1434.9
  TopLayer w10: IC2.14 1761.42,2676.46 1759.07,2674.11 1759.07,2654.43 R9.2 1759,2631.5 1759,2608.84 v1(1763.84,2604)
  BottomLayer w10: v1(1763.84,2604) 1759,2599.16 1759,2539 1901,2397 1901,1858.21 2167.72,1591.5 2211.19,1591.5 2252.69,1550 J5.12
LVDS4_P: IC2.13 J5.11 R9.1 | length 1352.8
  TopLayer w10: v1(1739.16,2604) 1744,2608.84 1744,2632.5 R9.1 1744.07,2653.58 1744.07,2674.11 1741.73,2676.46 IC2.13
  BottomLayer w10: v1(1739.16,2604) 1744,2599.16 1744,2532.79 1886,2390.79 1886,1852 2188,1550 J5.11
LVDS5_N: IC9.48 J5.15 R24.2 | length 879.5
  TopLayer w10: v1(1610.66,1292) 1613.5,1292 1615.5,1290 1615.5,1235 R24.2 1616.07,1212.42 1616.07,1185.89 1613.73,1183.54 IC9.48
  BottomLayer w10: v1(1610.66,1292) 1615.5,1287.16 1615.5,1220.29 1649.79,1186 1782,1186 1943,1347 2191,1347 J5.15
LVDS5_P: IC9.47 J5.14 R24.1 | length 989.4
  TopLayer w10: IC9.47 1633.42,1183.54 1631.07,1185.89 1631.07,1213.57 R24.1 1630.5,1235 1630.5,1290 1632.5,1292 v1(1635.34,1292)
  BottomLayer w10: v1(1635.34,1292) 1630.5,1287.16 1630.5,1226.5 1656,1201 1775.79,1201 1936.79,1362 2147.32,1362 2176.81,1391.5 2235.5,1391.5 J5.14
LVDS6_N: IC9.4 J5.18 R15.2 | length 1022.7
  TopLayer w10: v1(1484,1069.16) 1484,1070 1488,1074 1516.5,1074 1518,1075.5 1524,1075.5 R15.2 1547.06,1076.56 1561.11,1076.56 1563.46,1074.21 IC9.4
  BottomLayer w10: v1(1484,1069.16) 1488.84,1074 1539.21,1074 1597.21,1132 1869.21,1132 1972.21,1235 2150.32,1235 2176.81,1208.51 2211.19,1208.51 2252.69,1250 J5.18
LVDS6_P: IC9.3 J5.17 R15.1 | length 893.6
  TopLayer w10: v1(1484,1093.84) 1484,1093 1488,1089 1510.29,1089 1511.79,1090.5 1524,1090.5 R15.1 1544.95,1091.56 1561.11,1091.56 1563.46,1093.9 IC9.3
  BottomLayer w10: v1(1484,1093.84) 1488.84,1089 1533,1089 1591,1147 1863,1147 1966,1250 J5.17
LVDS7_N: IC9.10 J5.21 R17.2 | length 898.3
  TopLayer w10: v1(1489,956.16) 1493.84,961 1514,961 1525.5,949.5 R17.2 1534.95,958.44 1561.11,958.44 1563.46,956.1 IC9.10
  BottomLayer w10: v1(1489,956.16) 1489,958 1492,961 1539,961 1593,907 1802,907 1902,1007 2040.21,1007 2082.21,1049 2193,1049 J5.21
LVDS7_P: IC9.9 J5.20 R17.1 | length 1034.8
  TopLayer w10: v1(1489,980.84) 1493.84,976 1514,976 1524.5,986.5 1537.56,973.44 1561.11,973.44 1563.46,975.79 IC9.9
  BottomLayer w10: v1(1489,980.84) 1489,979 1492,976 1545.21,976 1599.21,922 1795.79,922 1895.79,1022 2034,1022 2076,1064 2149.32,1064 2176.81,1091.5 2235.5,1091.5 J5.20
LVDS8_N: IC9.14 J5.24 R19.2 | length 871.5
  TopLayer w10: IC9.14 1633.42,866.46 1631.07,864.11 1631.07,846.43 R19.2 1631.5,824 1631.5,794 1633.5,792 v1(1636.34,792)
  BottomLayer w10: v1(1636.34,792) 1631.5,796.84 1631.5,823.5 1658,850 1971,850 2044,923 2162.32,923 2176.81,908.51 2252.51,908.51 J5.24
LVDS8_P: IC9.13 J5.23 R19.1 | length 777.8
  TopLayer w10: v1(1611.66,792) 1614.5,792 1616.5,794 1616.5,824 R19.1 1616.07,845.58 1616.07,864.11 1613.73,866.46 IC9.13
  BottomLayer w10: v1(1611.66,792) 1616.5,796.84 1616.5,829.71 1651.79,865 1964.79,865 2037.79,938 2182,938 J5.23
NetIC1_1: IC1.1 IC1.3 IC3.2 IC4.15 | length 943.9
  TopLayer w5: IC1.1 1343,2549 ; IC1.3 IC1.3@1317,2649 ; IC3.2 1391,2502 1344,2549 1343,2549 ; IC4.15 1393,3180 1382,3169 1382,3132 1400,3114 1400,2927 1376,2903 1376,2684 1341,2649 IC1.3@1317,2649 ; IC1.3@1317,2649 1349,2617 1349,2555 1343,2549
NetIC1_4: IC1.4 IC1.6 IC3.3 IC4.14 | length 1197.5
  TopLayer w5: IC3.3 1298,2452 1206,2544 1206,2659 1246,2699 IC1.4 1333,2699 1353,2719 1353,2764 1318,2799 1340,2799 1362,2821 1362,2923 1387,2948 1387,3098 1358,3127 1358,3203 1385,3230 IC4.14
NetIC1_7: IC1.7 IC1.9 IC3.4 IC4.13 | length 1316.8
  TopLayer w5: IC3.4 1320,2402 1194,2528 1194,2806 1237,2849 IC1.7 1339,2849 1342,2852 1342,2924 1318,2948 1318,2949 1351,2949 1366,2964 1366,3093 1331,3128 1331,3245 1366,3280 IC4.13
NetIC1_10: IC1.10 IC1.12 IC3.5 IC4.12 | length 1407.1
  TopLayer w5: IC3.5 1350,2352 1178,2524 1178,2935 1242,2999 IC1.10 1317,2999 1349,3031 1349,3066 1316,3099 IC1.12 1290.07,3279.07 1341,3330 IC4.12
NetIC1_24: IC1.24 IC3.6 IC4.11 | length 1738.6
  TopLayer w5: IC1.24 979,2549 ; IC3.6 1380,2302 1184,2498 1030,2498 979,2549 ; IC4.11 1261,3380 1029,3148 1029,2599 979,2549
NetIC2_1: IC2.1 IC2.5 IC2.8 IC2.12 IC2.19 IC2.21 IC2.40 IC2.42 R21.1 SW1.1 T1.1 | length 1822.4
  TopLayer w5: IC2.8 1745.47,2805.47 1746,2806 ; IC2.5 1744.47,2864.53 1746,2863 ; IC2.1 1716.44,2941 1749,2941 ; SW1.1 1816.8,2120.8 1758.5,2062.5 R21.1 1738.5,2067 1579,2067 1563,2083 1563,2142 1575,2154 1575,2561 1608,2594 1626,2594 1693,2661 1693,2714 1705.73,2726.73 IC2.12 1738.73,2726.73 1746,2734 ; IC2.19 1859.84,2732.16 1858,2734 ; IC2.42 1859.84,2948.84 ; IC2.40@1897,2968.61 IC2.40 1899.21,2943.21 1897,2941 1867.69,2941 1859.84,2948.84 ; IC2.21 1899.21,2724.79 1890,2734 1858,2734 ; 1746,2734 1858,2734 ; 1746,2734 1746,2806 ; 1746,2806 1746,2863 ; 1746,2863 1746,2938 1749,2941 ; 1749,2941 1852,2941 1859.84,2948.84
NetIC2_20: IC2.20 IC2.22 IC2.39 IC2.41 R10.1 R13.1 | length 1638.6
  TopLayer w5: v1(1680,2613) 1724,2569 1870,2569 1888,2587 1888,2610 1918.5,2640.5 R10.1@1918.9,2640.5 ; IC2.20 1879.53,2663.47 1898,2645 1914.4,2645 R10.1@1918.9,2640.5 ; IC2.41 1879.53,3031.97 R13.1 1904.5,3033.5 ; v1(1916,3118) 1916,3058 1904.5,3046.5 1904.5,3033.5 ; IC2.22 R10.1@1918.9,2640.5 ; IC2.39 1918.9,3019.1 1904.5,3033.5 ; R10.1 R10.1@1918.9,2640.5
  BottomLayer w5: v1(1680,2613) 1619,2613 1539,2693 1539,3036 1643,3140 1894,3140 v1(1916,3118)
NetIC2_25: IC2.25 IC3.12 | length 818.1
  TopLayer w5: IC3.12 1607,2352 1589,2370 1589,2551 1615,2577 1695,2577 1722,2550 1940,2550 1971,2581 1971,2644 1993,2666 1993,2703 1985.83,2710.17 IC2.25 IC2.25@1986.34,2726.22
NetIC2_26: IC2.26 IC4.5 | length 1077.4
  TopLayer w5: IC4.5 1939,3330 2116,3153 2116,2914 2140,2890 2140,2793 2093.42,2746.42 IC2.26
NetIC2_28: IC2.28 IC3.13 | length 850.3
  TopLayer w5: IC3.13 1640.37,2402 1603,2439.37 1603,2512 1605.29,2514.29 1605.29,2516.92 1609.68,2521.31 1933.31,2521.31 1992,2580 1992,2647 2068,2723 v1(2068,2727) ; IC2.28 2040.21,2785.79 v1(2049,2777)
  BottomLayer w5: v1(2049,2777) 2068,2758 v1(2068,2727)
NetIC2_29: IC2.29 IC4.4 | length 979
  TopLayer w5: IC4.4 1953,3280 2100,3133 2100,2907 2128,2879 2128,2819 2114.47,2805.47 IC2.29
NetIC2_32: IC2.32 IC3.14 | length 1116.3
  TopLayer w5: IC3.14 1764,2452 1803,2413 1989,2413 2028,2452 2028,2609 2187,2768 v1(2187,2873) ; IC2.32 2036.53,2864.53 2054.34,2882.34 2073.18,2882.34 2080.53,2875 v1(2102,2875)
  BottomLayer w5: v1(2102,2875) 2104,2873 v1(2187,2873)
NetIC2_33: IC2.33 IC4.3 | length 779.4
  TopLayer w5: IC4.3 1967,3230 2078,3119 2078,2912 2059,2893 2037,2893 2028.21,2884.21 IC2.33
NetIC2_35: IC2.35 IC3.15 | length 1108.2
  TopLayer w5: IC3.15 1741,2502 1817,2426 1975.59,2426 2006,2456.41 2006,2628 2161,2783 2161,2910 v1(2144,2927) ; IC2.35 v1(2052.58,2923.58)
  BottomLayer w5: v1(2052.58,2923.58) 2056,2927 v1(2144,2927)
NetIC2_36: IC2.36 IC4.2 | length 611.4
  TopLayer w5: IC4.2 1976,3180 2029,3127 2029,2962.27 2010,2943.27 IC2.36
NetIC3_11: IC3.11 R1.1 T1.3 | length 330.4
  TopLayer w5: T1.3 1598.72,2299.72 1601,2302 IC3.11 1661,2302 1693.5,2334.5 R1.1
NetIC8_1: IC8.1 IC8.3 IC10.2 IC11.15 | length 1234.2
  TopLayer w5: IC8.3@1320.86,851 IC8.3@1339,851 ; IC11.15 1288,1434 1282,1428 1282,1367 1296,1353 1372,1353 1394,1331 1394,880 1365,851 IC8.3@1339,851 ; IC10.2@1347.7,594 1298,594 1230,662 1230,736 1245,751 IC8.1 1339,751 1369,781 1369,821 IC8.3@1339,851
NetIC8_4: IC8.4 IC8.6 IC10.3 IC11.14 | length 1305.4
  TopLayer w5: IC8.4 1256,901 1216,861 1216,615 1287,544 IC10.3@1347.7,544 ; IC8.6 1337,1001 1375,1039 1375,1323 1361,1337 1285,1337 1263,1359 1263,1471 1276,1484 IC11.14 ; IC8.4@1336,901 1339,901 1362,924 1362,975 IC8.6@1344,993
NetIC8_7: IC8.7 IC8.9 IC10.4 IC11.13 | length 1445.3
  TopLayer w5: IC11.13 1266,1534 1246,1514 1246,1346 1268,1324 1356,1324 1363,1317 1363,1173 1341,1151 1341,1147 1360,1128 1360,1072 1339,1051 IC8.7 1246,1051 1200,1005 1200,583 1289,494 IC10.4@1347.7,494
NetIC8_10: IC8.10 IC8.12 IC10.5 IC11.12 | length 1515.2
  TopLayer w5: IC8.10 1245,1201 ; IC8.12 1245,1301 1234.5,1311.5 ; IC11.12 1271,1584 1224,1537 1224,1322 1234.5,1311.5 ; IC10.5@1347.7,444 1286,444 1177,553 1177,1133 1245,1201 ; 1234.5,1311.5 1234.5,1307.5 1222,1295 1222,1224 1245,1201
NetIC8_24: IC8.24 IC10.6 IC11.11 | length 1701.1
  TopLayer w5: IC11.11 1237,1634 1202,1599 1202,1534 1027,1359 1027,781 997,751 IC8.24 942.93,718.07 971,690 1012,690 1308,394 IC10.6@1347.7,394
NetIC9_1: IC9.1 IC9.5 IC9.8 IC9.12 IC9.19 IC9.21 IC9.40 IC9.42 R22.1 SW1.2 T2.1 | length 3263.4
  TopLayer w5: IC9.8 1616.53,995.47 1617,995 ; IC9.5 1615.47,1054.53 1617,1053 ; IC9.19 1731.84,921.84 1732,922 ; IC9.42 1731.84,1129.84 1730,1128 ; T2.1 1736.6,305.1 R22.1 1724.5,293 1700,293 1652,245 1516,245 1483,278 1483,722 1570,809 1570,910 1576.73,916.73 IC9.12 1610.73,916.73 1622,928 ; IC9.21 1771.21,914.79 1764,922 1732,922 ; IC9.40 1771.21,1133.21 1766,1128 1730,1128 ; SW1.2 1959,1985 1891,1917 1508,1917 1463,1872 1463,1798 1495,1766 1495,1266 1586.17,1174.83 IC9.1 1602.73,1133.27 1617,1119 ; 1617,995 1617,933 1622,928 ; 1617,995 1617,1053 ; 1617,1053 1617,1119 ; 1617,1119 1626,1128 1730,1128 ; 1622,928 1628,922 1732,922
NetIC9_20: IC9.20 IC9.22 IC9.39 IC9.41 R20.1 R23.1 | length 1673.6
  TopLayer w5: v1(1745,1307) 1745,1267 1787.5,1224.5 R20.1 1790.9,1221.6 1790.9,1198 ; IC9.20 1751.53,875.47 1790.9,836.1 IC9.22 ; IC9.41 1751.53,1185.53 1764,1198 1790.9,1198 ; R23.1 1761,805.5 1761,770 v1(1798,733) ; IC9.39 1790.9,1198 ; v1(1883,1445) 2068,1260 2068,846 v1(2064,842)
  BottomLayer w5: v1(1745,1307) v1(1883,1445) ; v1(1798,733) 1955,733 v1(2064,842)
NetIC9_25: IC9.25 IC10.12 | length 843.7
  TopLayer w5: IC10.12@1560.3,444 1519,444 1499,464 1499,669 1541,711 1831,711 1861.34,741.34 1861.34,913.22 IC9.25
NetIC9_26: IC9.26 IC11.5 | length 1045.8
  TopLayer w5: IC11.5 1696,1584 2009,1271 2009,1122.69 2007.07,1120.77 2007.07,996.55 1946.94,936.42 IC9.26
NetIC9_28: IC9.28 IC10.13 | length 942.6
  TopLayer w5: IC10.13@1560.3,494 1517,494 1511,500 1511,658 1551,698 1841,698 1880,737 1880,891 1906,917 v1(1925,917) ; IC9.28 1917,975.79 1925,967.79 v1(1925,958)
  BottomLayer w5: v1(1925,917) v1(1925,958)
NetIC9_29: IC9.29 IC11.4 | length 941.7
  TopLayer w5: IC11.4 1711,1534 1994.87,1250.13 1994.87,1029.87 1960.47,995.47 IC9.29
NetIC9_32: IC9.32 IC10.14 | length 1187.9
  TopLayer w5: IC10.14@1560.3,544 1930,544 2050,664 2050,831.47 2046.66,834.82 2046.66,1086.66 v1(2050,1090) ; IC9.32 1892.57,1054.53 1893.66,1055.62 1893.66,1056.18 1903.82,1066.34 1907.82,1066.34 1911.1,1069.63 1953.9,1069.63 1969,1054.53 v1(1977.53,1054.53)
  BottomLayer w5: v1(1977.53,1054.53) 2013,1090 v1(2050,1090)
NetIC9_33: IC9.33 IC11.3 | length 808.3
  TopLayer w5: IC11.3 1728,1484 1983,1229 1983,1105 1970,1092 1919.33,1092 1903.67,1076.34 1859.96,1076.34 IC9.33
NetIC9_35: IC9.35 IC10.15 | length 1112.8
  TopLayer w5: IC10.15@1560.3,594 1946,594 2006,654 2006,715 2027,736 v1(2027,1117) ; IC9.35 v1(1963.58,1113.58)
  BottomLayer w5: v1(1963.58,1113.58) 1967,1117 v1(2027,1117)
NetIC9_36: IC9.36 IC11.2 | length 585
  TopLayer w5: IC11.2 1740,1434 1906,1268 1906,1172 IC9.36@1866,1132
NetIC10_11: IC10.11 R11.1 T2.3 | length 300.7
  TopLayer w5: IC10.11@1560.3,394 1668,394 1718.28,444.28 T2.3 1770.5,447.77 R11.1@1770.5,509
P3V3: C8.2 C9.1 C10.2 C11.2 C12.2 C13.2 C14.2 C15.2 C16.2 C17.2 C18.1 C19.2 C20.2 C21.2 C22.2 C23.2 C24.2 C25.2 C26.2 C27.1 C37.2 IC2.2 IC2.11 IC2.15 IC2.16 IC2.24 IC2.30 IC2.37 IC2.45 IC2.46 IC3.10 IC3.16 IC4.1 IC4.7 IC5.3 IC7.8 IC9.2 IC9.11 IC9.15 IC9.16 IC9.24 IC9.30 IC9.37 IC9.45 IC9.46 IC10.10 IC10.16 IC11.1 IC11.7 R1.2 R11.2 R21.2 R22.2 | length 3347.7
  TopLayer w10: v1(1519.16,804) 1519.16,816.84 1519,817 1534.72,832.72 C25.2 1534.72,905.72 1565.42,936.42 IC9.11 ; v1(1536.72,1198.72) C26.2 1536.72,1146.28 1569.42,1113.58 IC9.2 ; IC3.16 v1(1694,2552) ; IC9.15 1653.1,870.9 1661,863 1677,863 ; IC9.46 1653.1,1182.1 1656.79,1185.79 1672.79,1185.79 ; v1(1659.72,3006.72) C14.2 1659.72,2961.28 1697.42,2923.58 IC2.2 ; v1(1660.72,2658.28) C15.2 1660.72,2710.72 1696.42,2746.42 IC2.11 ; IC9.16 1672.79,867.21 1677,863 ; IC9.45 1672.79,1185.79 ; C24.2@1685,836 1685,855 1677,863 ; v1(1694.28,791.28) C24.2 ; v1(1717,1235) 1709.28,1227.28 C8.2 1686,1199 1672.79,1185.79 ; v1(1736,3413) C10.2 ; v1(1769,263) 1768.5,263.5 R22.2 1768.5,375.5 1805.5,412.5 R11.2 ; IC2.15 1781.1,2683.9 1789,2676 1803,2676 ; IC2.46 1781.1,2988.1 1789.79,2996.79 1800.79,2996.79 ; IC2.16 1800.79,2678.21 1803,2676 ; IC2.45 1800.79,2996.79 ; v1(1825.28,2600.72) C11.2 1825.28,2653.72 1803,2676 ; v1(1827,761) 1844.84,778.84 1844.84,855.16 1830.27,869.73 IC9.24 ; IC9.37 1830.27,1218.55 C20.2 v1@1860.28,1224.28 ; v1(1849.72,3036.28) C12.2 1822,3018 1800.79,2996.79 ; IC9.30 1909.44,1015.16 C23.2 1911,1017.28 1916,1022.28 v1(1916,1050) ; IC2.24 1958.27,2683.73 v1(1969,2673) ; IC2.37 1958.27,2998.27 C19.2@1981.28,3021.28 ; IC2.30 2047.44,2825.16 C13.2 2050.28,2849.28 v1(2066,2865) ; v1(1988,2991) C19.2 ; IC7.8 2366,2498.39 v1(2366,2588)
  TopLayer w15: IC11.1 v1(1597,1384) ; IC11.7 1612.28,1684 C17.2 v1(1646.72,1683.28) ; IC10.10@1560.3,344 1619.72,344 1629,334.72 C22.2 1640.28,336 v1(1670,336) ; IC10.16@1560.3,644 v1(1622,644) ; IC3.10 1707.72,2252 C16.2 v1(1751.72,2243.72) ; IC4.1 1629,3130 1601,3158 1601,3415 1616,3430 IC4.7 1703,3430 1713.28,3440.28 C10.2 ; R1.2 v1(1749.5,2297.5) ; R21.2 v1(1743,2135)
  TopLayer w30: IC5.3 518.54,500 C27.1
  other v1: 748,409 768,409 788,409 788,431 748,432 768,433 748,454 768,454 788,454 2009,454 2031,454 2054,454 2009,494 2032,494 2054,494 1866,1224 2213,2987 2235,2987 2258,2987 2213,3027 2236,3027 2258,3027
P5V0: C6.2 C7.1 C33.2 C34.1 C35.2 C36.1 IC5.2 IC6.1 IC12.1 J5.28 J5.29 | length 6290
  TopLayer w30: IC5.2 591.76,223.76 629.28,261.28 756.39,261.28 C34.1 768.1,267.9 887,149 2017,149 2139,271 2139,595 J5.29 ; IC6.1 1516.1,1843.1 C7.1 1930.1,1843.1 ; IC12.1 2084,3603 2128,3559 2128,3438 2152.1,3413.9 C36.1 2152.1,3300.9 2190,3263 2360,3263 2423,3200 2423,2870 2100,2547 2100,2013 1930.1,1843.1 ; J5.28 J5.29 ; 1930.1,1843.1 1930.1,1768.9 2125,1574 2125,719 J5.29
P5V0_ISO1: C1.2 C2.2 C3.2 C4.2 C5.1 IC1.13 IC1.16 IC1.21 IC3.1 IC3.7 IC4.10 IC4.16 IC12.6 | length 625.9
  TopLayer w20: v1(842,2728) 842,2695.28 C2.2 919.93,2695 IC1.21 ; v1(842,3034) 838.72,3037.28 C3.2 871,3080 890,3099 IC1.13 ; IC1.16 v1(988,2949) ; v1(1330,3436) 1402,3436 1408,3430 IC4.10 ; v1(1332.28,2247.72) C1.2 1374.28,2252 IC3.7 ; v1(1380,2552) IC3.1 ; v1(1442.7,3091.7) IC4.16
  other v1: 1048,3382 1088,3382 1088,3404 1048,3405 1048,3427 1088,3427
P5V0_ISO2: C28.2 C29.2 C30.2 C31.2 C32.1 IC6.6 IC8.13 IC8.16 IC8.21 IC10.1 IC10.7 IC11.10 IC11.16 | length 614.1
  TopLayer w20: v1(855.72,1306.72) C29.2 876,1275 902,1301 IC8.13 ; v1(860,1151) IC8.16 ; v1(860.72,863.72) C30.2 938.93,897 IC8.21 ; v1(1221.28,1697.28) C31.2 1274.28,1684 IC11.10 ; v1(1296,644) IC10.1@1347.7,644 ; v1(1307,373) 1308,372 C28.2@1308,344 ; C28.2 C28.2@1308,344 ; IC11.16 v1(1374,1384) ; IC10.7@1347.7,344 C28.2@1308,344
  other v1: 1104,1635 1144,1635 1144,1657 1104,1658 1104,1680 1144,1680
pads on no net: IC2.17 IC2.44 IC4.6 IC6.5 IC9.17 IC9.44 IC11.6 IC12.5 J1.6 J1.7 J2.6 J2.7 J3.6 J3.7 J4.6 J4.7 J5.30

## Polygon pours and split planes (outlines as drawn)
P3V3 on MidLayer1 "MidLayer1-No Net" (solid, remove dead copper, pour order 4): 70,608 70,319 240,319 240,119 2456.69,119 2456.69,3818 1758,3818 1758,3498 1609,3498 1537,3426 1537,2076 1519,2058 1370,2058 1370,1825 1465,1730 1465,210 1447,192 1255,192 1237,210 1237,365 994,608
P5V0_ISO2 on MidLayer1 "MidLayer1-No Net" (solid, remove dead copper, pour order 2): 63,2002 1309,2002 1309,1801 1405,1705 1405,252 1297,252 1297,389 1018,668 63,668
P5V0_ISO1 on MidLayer1 "MidLayer1-No Net" (solid, remove dead copper, pour order 0): 73,2117 73,3863 1698,3863 1698,3558 1587,3558 1476,3447 1476,2118
GND_ISO2 on TopLayer "MidLayer1-No Net" (solid, remove dead copper, pour order 10): 63,2002 1309,2002 1309,1801 1405,1705 1405,252 1297,252 1297,389 1018,668 63,668
GND on TopLayer "MidLayer1-No Net" (solid, remove dead copper, pour order 14): 70,608 70,319 240,319 240,119 2456.69,119 2456.69,3818 1758,3818 1758,3498 1609,3498 1537,3426 1537,2076 1519,2058 1370,2058 1370,1825 1465,1730 1465,210 1447,192 1255,192 1237,210 1237,365 994,608
GND_ISO1 on TopLayer "MidLayer1-No Net" (solid, remove dead copper, pour order 6): 240,3819 240,3619 74,3619 74,2118 1476,2118 1476,3447 1587,3558 1698,3558 1698,3819
GND on BottomLayer "MidLayer1-No Net" (solid, remove dead copper, pour order 16): 70,608 70,319 240,319 240,119 2456.69,119 2456.69,3818 1758,3818 1758,3498 1609,3498 1537,3426 1537,2076 1519,2058 1370,2058 1370,1825 1465,1730 1465,210 1447,192 1255,192 1237,210 1237,365 994,608
GND_ISO2 on BottomLayer "MidLayer1-No Net" (solid, remove dead copper, pour order 12): 63,2002 1309,2002 1309,1801 1405,1705 1405,252 1297,252 1297,389 1018,668 63,668
GND_ISO1 on BottomLayer "MidLayer1-No Netd" (solid, remove dead copper, pour order 8): 240,3819 240,3619 74,3619 74,2118 1476,2118 1476,3447 1587,3558 1698,3558 1698,3819
GND_ISO1 on Internal Plane 1 (split plane): 1698.38,3557.62 1597,3557.62 1592.37,3557.25 1587.85,3556.17 1585.7,3555.28 1583.55,3554.39 1579.59,3551.96 1576.06,3548.94 1486.06,3458.94 1483.04,3455.41 1480.61,3451.45 1479.35,3448.41 1478.83,3447.15 1477.75,3442.63 1477.38,3438 1477.38,2117.62 72.62,2117.62 72.62,3863.38 1698.38,3863.38
GND_ISO2 on Internal Plane 1 (split plane): 1310.38,1813 1310.75,1808.37 1311.83,1803.85 1312.35,1802.59 1313.61,1799.55 1316.04,1795.59 1319.06,1792.06 1405.38,1705.73 1405.38,1324.31 1405.38,714.08 1405.38,251.62 1296.62,251.62 1296.62,377 1296.25,381.63 1295.17,386.15 1293.39,390.45 1290.96,394.41 1287.94,397.94 1026.94,658.94 1023.41,661.96 1019.45,664.39 1016.41,665.65 1015.15,666.17 1010.63,667.25 1006,667.62 61.62,667.62 61.62,2003.38 1310.38,2003.38
GND on Internal Plane 1 (split plane): 22.06,3913.94 20.1,3911.65 20.1,3916.9 25.52,3916.9
GND on Internal Plane 1 (split plane): 2475.97,20.1 20.1,20.1 20.1,610.97 22.85,609.83 27.37,608.75 32,608.38 993.73,608.38 1237.38,364.73 1237.38,222 1237.75,217.37 1238.83,212.85 1240.61,208.55 1243.04,204.59 1246.06,201.06 1249.59,198.04 1253.55,195.61 1257.85,193.83 1262.37,192.75 1267,192.38 1435,192.38 1439.63,192.75 1444.15,193.83 1448.45,195.61 1452.41,198.04 1455.94,201.06 1458.96,204.59 1461.39,208.55 1463.17,212.85 1464.25,217.37 1464.62,222 1464.62,714.08 1464.62,1324.31 1464.62,1718 1464.25,1722.63 1463.17,1727.15 1462.65,1728.41 1461.39,1731.45 1458.96,1735.41 1455.94,1738.94 1369.62,1825.27 1369.62,2033 1369.62,2058.38 1507,2058.38 1511.63,2058.75 1516.15,2059.83 1520.45,2061.61 1524.41,2064.04 1527.94,2067.06 1530.96,2070.59 1533.39,2074.55 1535.17,2078.85 1536.25,2083.37 1536.62,2088 1536.62,3425.73 1609.27,3498.38 1728,3498.38 1732.63,3498.75 1737.15,3499.83 1741.45,3501.61 1745.41,3504.04 1748.94,3507.06 1751.96,3510.59 1754.39,3514.55 1756.17,3518.85 1757.25,3523.37 1757.62,3528 1757.62,3893 1757.25,3897.63 1756.17,3902.15 1754.39,3906.45 1751.96,3910.41 1748.94,3913.94 1745.48,3916.9 2475.97,3916.9

## Keep-outs
KeepOutLayer:
  lines w8: 65,319 240,319 240,119 2456.69,119 2456.69,3819 240,3819 240,3619 65,3619 65,319

## Other copper
TopLayer:
  region net P5V0_ISO2: 1156,1608 1156,1691 1093,1691 1093,1608
  region net P5V0_ISO1: 1100,3355 1100,3438 1037,3438 1037,3355
  region net P3V3: 2285,3039 2202,3039 2202,2976 2285,2976
  region net GND: 2291,3185 2208,3185 2208,3122 2291,3122
  region net GND: 2325,3380 2325,3463 2262,3463 2262,3380
  region net GND: 1783,2000 1700,2000 1700,1937 1783,1937
  rectangle net GND: 1979,292 2062,355
  rectangle net P3V3: 1982,442 2065,505
  region net P3V3: 736,481 736,398 799,398 799,481
  rectangle net GND: 422,185 505,248
  region net GND: 956,298 956,381 893,381 893,298
  region net GND: 880,482 880,399 943,399 943,482
  rectangle net GND_ISO2: 836.61,1535.43 964.57,1628
  rectangle net GND_ISO1: 757.87,3287.4 885.83,3375.98
Internal Plane 1 (plane layer: these items are gaps in the copper):
  lines w59.06: 21,2086 28,2086 ; 1339,2033 1340,2033 ; 1340,2028 1340,2076 ; 1340,2033 32,2033 32,638 1006,638 1267,377 1267,222 1435,222 1435,714.08 1435,1324.31 1435,1718 1340,1813 1340,2033 ; 43,2088 43,3893 1728,3893 1728,3528 1597,3528 1507,3438 1507,2088 523,2088 43,2088

## Silkscreen, mask and mechanical layers (free items; w line width, h text height)
TopOverlay:
  circle w10: c140,217 r112.5
  circle w10: c140,3717 r112.5
Mechanical1:
  the board outline again, w20

## Dimensions
140,-20 to 0,0 on Mechanical4
-20,217 to 0,0 on Mechanical4

## Text inside footprints (layer, text, board x,y; h text height)
IC6: Mechanical14 "6" at 981.17,1923.92 h59.06 r270; Mechanical14 "1" at 1482.47,1918.92 h59.06 r270
IC12: Mechanical14 "6" at 1413.17,3687.92 h59.06 r270; Mechanical14 "1" at 1914.47,3682.92 h59.06 r270
J5: TopOverlay "30" at 2349,675 h40 r270; Mechanical14 "30" at 2349,675 h40 r270
SW1: TopOverlay "1" at 1854,2191 h39.37; TopOverlay "2" at 1944,2191 h39.37; TopOverlay "ON" at 1824,2366 h39.37; Mechanical14 "1" at 1854,2191 h39.37; Mechanical14 "2" at 1944,2191 h39.37; Mechanical14 "ON" at 1824,2366 h39.37